# EAGLE board tulip breakout (EAGLE 9.6.2)
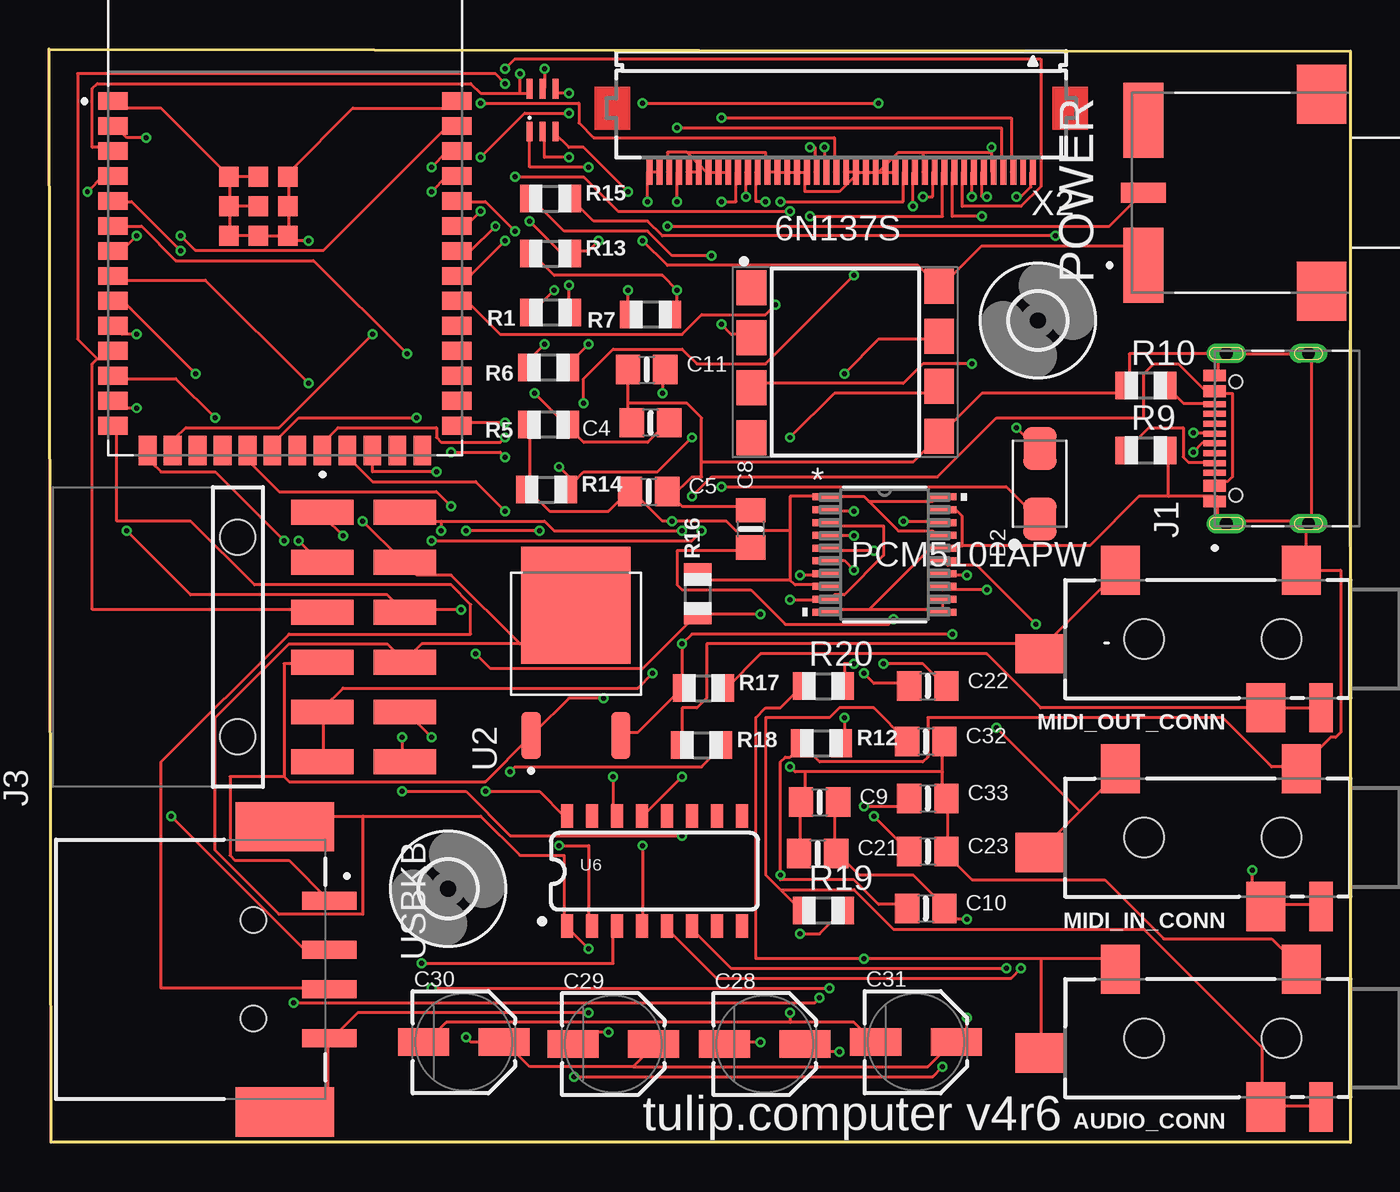
[diagram p0: board, top side]
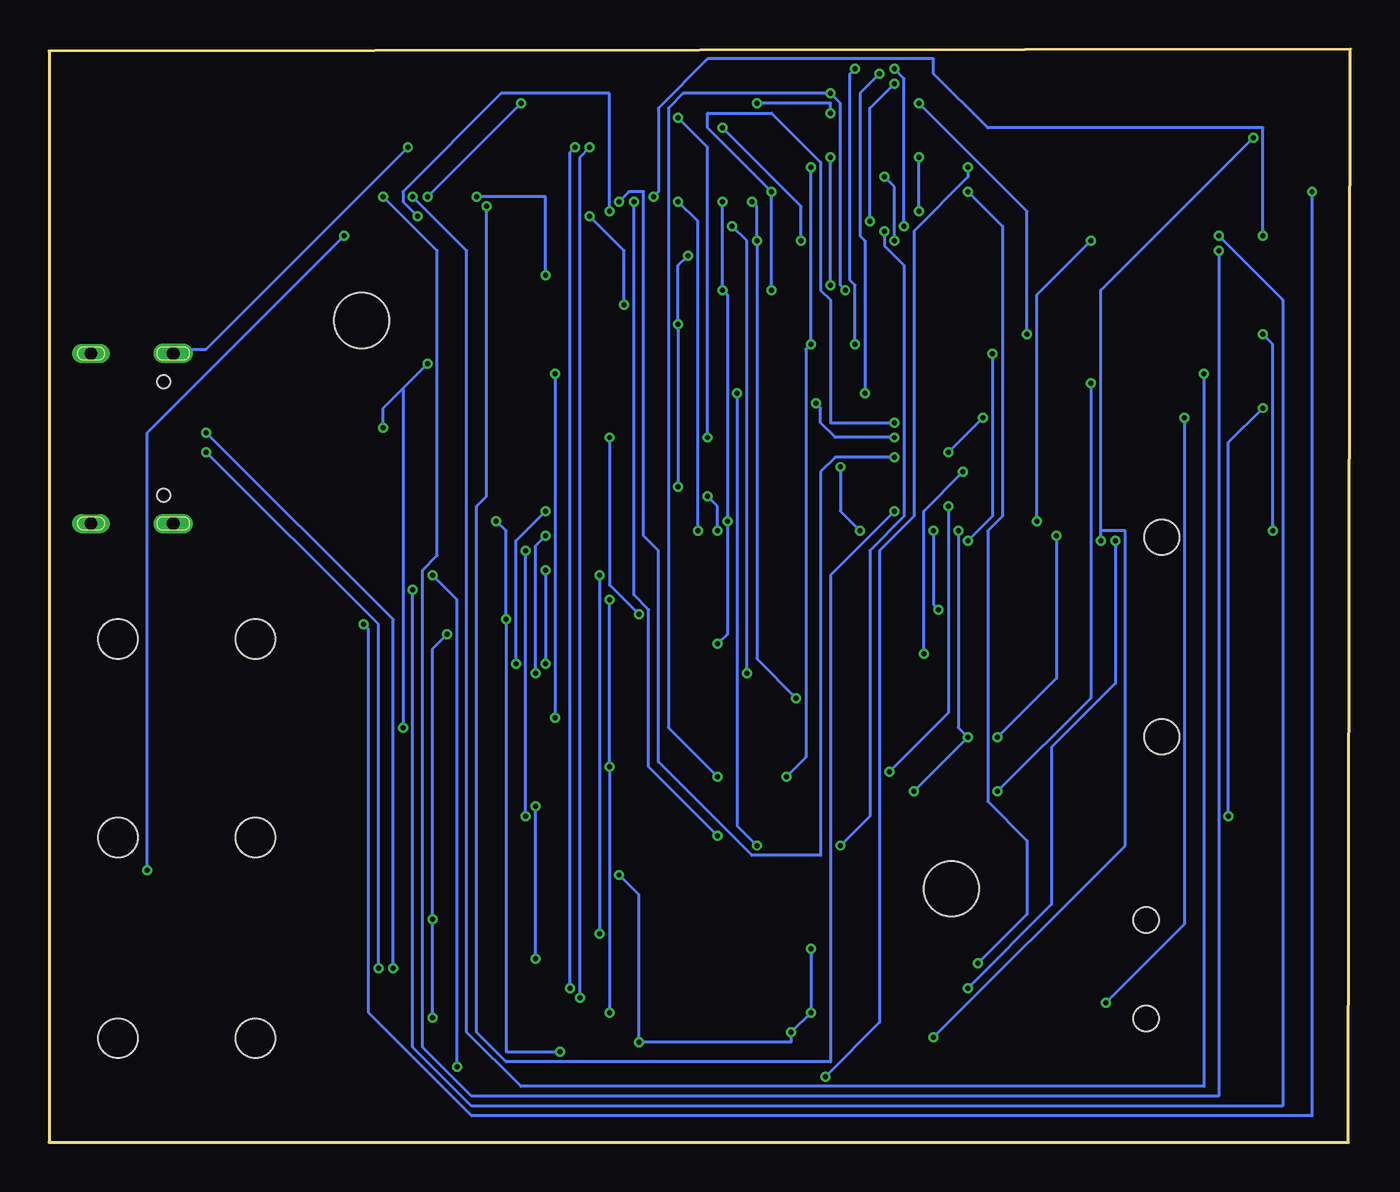
[diagram p1: board, bottom side, seen from below]

Size 66.2 x 55.6 mm. Coordinates in mm from the lower left corner, seen from the top.
Outline: 0.1,0 0,55.6 66.2,55.5 66.2,0 0.1,0
Copper layers (1*16): Top 0.035559375mm / dielectric 1.6mm / Bottom 0.035559375mm
Design rules "oshpark-2layer *": minimum track width 6mil, minimum drill 10mil, track to track 6mil, track to pad 6mil, pad to pad 6mil, via to via 6mil, smd to smd 6mil, copper to edge 0mil, drill to drill 6mil, minimum pad ring 5mil, minimum via ring 5mil, stop-mask expansion 2.5mil, vias tented up to drill 0mil, thermal gap 10mil
Net classes: 1 power: width 0.178 mm

## Footprints (pad centres in the part's own frame; a part is rotated, then mirrored left to right if it is on the bottom)
8-SMD = smd 1.52 x 1.78: 1 -4.96,3.96; 2 -4.96,1.42; 3 -4.96,-1.12; 4 -4.96,-3.66; 5 4.58,-3.59; 6 4.58,-1.05; 7 4.58,1.49; 8 4.58,4.03
4UCONN_19269 = smd 2 x 2.5: 1 2.5,-3.5; 2 11.7,-3.5; 3 4.3,3.5 | smd 2.5 x 2: 4 15.8,0.75 | smd 1.2 x 2.5: 5 1.5,3.5 | hole 2: 3.5,0; 10.5,0
0805-NO = smd 1.24 x 1.5: 1 -0.95,0; 2 0.95,0
PANASONIC_C = smd 2.6 x 1.4: + 2.05,0; - -2.05,0
DIOM449X264X300L114X135N = smd 2.17 x 1.69: A 1.795,0; C -1.795,0
2,8 = hole 2.8: 0,0
VALCON_CSP-USC16-TR = smd 0.3 x 1.14: A1 -3.35,0; A4 -2.55,0; A5 -1.25,0; A6 -0.25,0; A7 0.25,0; A8 1.25,0; A9 2.55,0; A12 3.35,0; B1 3.05,0; B4 2.25,0; B5 1.75,0; B6 0.75,0; B7 -0.75,0; B8 -1.75,0; B9 -2.25,0; B12 -3.05,0 | drill 0.65 pad 1 long: S1 -4.325,-0.59; S2 4.325,-0.59 | drill 0.65 pad 0.9 long: S3 -4.325,-4.77; S4 4.325,-4.77 | hole 0.65: -2.89,-1.07; 2.89,-1.07
SAMTEC_TSM-106-02-L-DH-A = smd 1.27 x 3.18: 01 6.35,-4.305; 02 6.35,-8.495; 03 3.81,-4.305; 04 3.81,-8.495; 05 1.27,-4.305; 06 1.27,-8.495; 07 -1.27,-4.305; 08 -1.27,-8.495; 09 -3.81,-4.305; 10 -3.81,-8.495; 11 -6.35,-4.305; 12 -6.35,-8.495 | hole 1.78: -5.08,0; 5.08,0
SW_500ASSP1SM6QE = smd 3.81 x 2.03: 1 -3.685,4.535; 3 3.685,4.535 | smd 1.02 x 2.29: 2 0,4.535 | smd 3 x 2.5: S1 -5,-4.535; S2 5,-4.535
R0805 = smd 1.1 x 1.4: 1 -1,0; 2 1,0
SOT236 = smd 0.3 x 1: 1 -0.66,-1.09; 2 0,-1.09; 3 0.66,-1.09; 4 0.66,1.09; 5 0,1.09; 6 -0.66,1.09
XCVR_ESP32-S3-WROOM-2-N32R8V = smd 1.5 x 0.9: 1 -8.75,5.26; 2 -8.75,3.99; 3 -8.75,2.72; 4 -8.75,1.45; 5 -8.75,0.18; 6 -8.75,-1.09; 7 -8.75,-2.36; 8 -8.75,-3.63; 9 -8.75,-4.9; 10 -8.75,-6.17; 11 -8.75,-7.44; 12 -8.75,-8.71; 13 -8.75,-9.98; 14 -8.75,-11.25; 27 8.75,-11.25; 28 8.75,-9.98; 29 8.75,-8.71; 30 8.75,-7.44; 31 8.75,-6.17; 32 8.75,-4.9; 33 8.75,-3.63; 34 8.75,-2.36; 35 8.75,-1.09; 36 8.75,0.18; 37 8.75,1.45; 38 8.75,2.72; 39 8.75,3.99; 40 8.75,5.26 | smd 0.9 x 1.5: 15 -6.985,-12.5; 16 -5.715,-12.5; 17 -4.445,-12.5; 18 -3.175,-12.5; 19 -1.905,-12.5; 20 -0.635,-12.5; 21 0.635,-12.5; 22 1.905,-12.5; 23 3.175,-12.5; 24 4.445,-12.5; 25 5.715,-12.5; 26 6.985,-12.5 | smd 1 x 1: 41_1 -1.36,-0.09; 41_2 -2.86,-0.09; 41_3 0.14,-0.09; 41_4 -2.86,-1.59; 41_5 -1.36,-1.59; 41_6 0.14,-1.59; 41_7 -2.86,1.41; 41_8 -1.36,1.41; 41_9 0.14,1.41
DPAK456P972X240-3N = smd 2.4 x 0.98: 1 -4.2,2.28; 2 -4.2,-2.28 | smd 5.96 x 5.57: 3 2.42,0
PW20_TEX = smd 1.473 x 0.356: 1 -2.921,2.925; 2 -2.921,2.275; 3 -2.921,1.625; 4 -2.921,0.975; 5 -2.921,0.325; 6 -2.921,-0.325; 7 -2.921,-0.975; 8 -2.921,-1.625; 9 -2.921,-2.275; 10 -2.921,-2.925; 11 2.921,-2.925; 12 2.921,-2.275; 13 2.921,-1.625; 14 2.921,-0.975; 15 2.921,-0.325; 16 2.921,0.325; 17 2.921,0.975; 18 2.921,1.625; 19 2.921,2.275; 20 2.921,2.925
SO016 = smd 0.6 x 1.2: 1 -4.445,-2.8; 2 -3.175,-2.8; 3 -1.905,-2.8; 4 -0.635,-2.8; 5 0.635,-2.8; 6 1.905,-2.8; 7 3.175,-2.8; 8 4.445,-2.8; 9 4.445,2.8; 10 3.175,2.8; 11 1.905,2.8; 12 0.635,2.8; 13 -0.635,2.8; 14 -1.905,2.8; 15 -3.175,2.8; 16 -4.445,2.8
SAMTEC_USB-A-S-X-X-SM2 = smd 0.9 x 2.8: 01 -3.5,3.85; 02 -1,3.85; 03 1,3.85; 04 3.5,3.85 | smd 2.5 x 5: S1 -7.25,1.6; S2 7.25,1.6 | hole 1.3: -2.5,0; 2.5,0
FH12-40S-0.5SH = smd 0.3 x 1.3: 1 -9.75,3.25; 2 -9.25,3.25; 3 -8.75,3.25; 4 -8.25,3.25; 5 -7.75,3.25; 6 -7.25,3.25; 7 -6.75,3.25; 8 -6.25,3.25; 9 -5.75,3.25; 10 -5.25,3.25; 11 -4.75,3.25; 12 -4.25,3.25; 13 -3.75,3.25; 14 -3.25,3.25; 15 -2.75,3.25; 16 -2.25,3.25; 17 -1.75,3.25; 18 -1.25,3.25; 19 -0.75,3.25; 20 -0.25,3.25; 21 0.25,3.25; 22 0.75,3.25; 23 1.25,3.25; 24 1.75,3.25; 25 2.25,3.25; 26 2.75,3.25; 27 3.25,3.25; 28 3.75,3.25; 29 4.25,3.25; 30 4.75,3.25; 31 5.25,3.25; 32 5.75,3.25; 33 6.25,3.25; 34 6.75,3.25; 35 7.25,3.25; 36 7.75,3.25; 37 8.25,3.25; 38 8.75,3.25; 39 9.25,3.25; 40 9.75,3.25

## Placement (x,y rotation side)
6N137S  6N137S  [8-SMD]  40.7,39.5 0 top
AUDIO_CONN  19269  [4UCONN_19269]  66.2,5.3 180 top
C4  4.7uF  [0805-NO]  30.6,36.6 180 top
C5  4.7uF  [0805-NO]  30.5,33.1 0 top
C8  0.1uF  [0805-NO]  35.7,31.2 90 top
C9  0.1uF  [0805-NO]  39.2,17.3 0 top
C10  0.1uF  [0805-NO]  44.6,11.9 0 top
C11  10uF  [0805-NO]  30.4,39.3 0 top
C21  0.1uF  [0805-NO]  39.1,14.7 0 top
C22  2.2uF  [0805-NO]  44.7,23.2 0 top
C23  2.2uF  [0805-NO]  44.7,14.8 0 top
C28  10uF  [PANASONIC_C]  36.4,5 0 top
C29  10uF  [PANASONIC_C]  28.7,5 0 top
C30  10uF  [PANASONIC_C]  21.1,5.1 0 top
C31  10uF  [PANASONIC_C]  44.1,5.1 0 top
C32  2.2nF  [0805-NO]  44.6,20.4 0 top
C33  2.2nF  [0805-NO]  44.7,17.5 0 top
D2  EGF1A  [DIOM449X264X300L114X135N]  50.4,33.5 90 top
H1  MOUNT-HOLE2.8  [2,8]  20.3,12.9 0 top
H2  MOUNT-HOLE2.8  [2,8]  50.3,41.8 0 top
J1  CSP-USC16-TR  [VALCON_CSP-USC16-TR]  59.3,35.8 90 top
J3  TSM-106-02-L-DH-A  [SAMTEC_TSM-106-02-L-DH-A]  9.6,25.7 90 top
MIDI_IN_CONN  19269  [4UCONN_19269]  66.2,15.5 180 top
MIDI_OUT_CONN  19269  [4UCONN_19269]  66.2,25.6 180 top
POWER  500ASSP1SM6QE  [SW_500ASSP1SM6QE]  60.2,48.3 90 top
R1  100k  [R0805]  25.5,42.2 180 top
R5  10k  [R0805]  25.4,36.5 180 top
R6  100k  [R0805]  25.4,39.4 180 top
R7  10k  [R0805]  30.6,42.1 180 top
R9  5.1K  [R0805]  55.8,35.2 0 top
R10  5.1K  [R0805]  55.8,38.5 0 top
R12  4.7K  [R0805]  39.3,20.3 0 top
R13  4.7K  [R0805]  25.5,45.2 0 top
R14  4.7K  [R0805]  25.3,33.2 0 top
R15  220  [R0805]  25.5,48 0 top
R16  470  [R0805]  33,27.9 90 top
R17  33  [R0805]  33.3,23.1 0 top
R18  10  [R0805]  33.2,20.2 0 top
R19  470  [R0805]  39.4,11.8 0 top
R20  470  [R0805]  39.4,23.2 0 top
RESET  MBT3904DW1T1G  [SOT236]  25.1,52.5 0 top
U1  ESP32-S3-WROOM-2-N32R8V  [XCVR_ESP32-S3-WROOM-2-N32R8V]  12,47.7 0 top
U2  LD29150DT33R  [DPAK456P972X240-3N]  26.8,24.9 90 top
U3  PCM5101APW  [PW20_TEX]  42.5,29.9 0 top
U6  CH340C  [SO016]  30.8,13.8 0 top
USBKB  USB-A-S-X-X-SM2  [SAMTEC_USB-A-S-X-X-SM2]  10.4,8.8 270 top
X2  FH12-40S-0.5SH  [FH12-40S-0.5SH]  40.3,52.6 180 top

## Library data of the parts
6N137S = 6N137S; AVAILABILITY: In Stock; DESCRIPTION: Logic Output Optoisolator 15MBd Open Collector 5000Vrms 1 Channel 10kV/µs CMTI 8-SMD; MF: Lite-On Inc.; MP: 6N137S; PACKAGE: SMD-8 Lite-On Inc.; PRICE: None; PURCHASE-URL: https://pricing.snapeda.com/search/part/6N137S/?ref=eda
AUDIO_CONN C4 C5 C8-C11 C21-C23 C28-C33 MIDI_IN_CONN MIDI_OUT_CONN = microbuilder
D2 = EGF1A; AVAILABILITY: In Stock; DESCRIPTION: Diode Standard 50 V 1A Surface Mount DO-214AC (SMA); MF: ON Semiconductor; MP: EGF1A; PACKAGE: SMA-2 ON Semiconductor; PRICE: None; PURCHASE-URL: https://pricing.snapeda.com/search/part/EGF1A/?ref=eda
H1 H2 = holes
J1 = CSP-USC16-TR; AVAILABILITY: In Stock; DESCRIPTION: CSP-USC16-TR Valcon USB Type C Surface Mount PCB Socket; MF: Valcon; MP: CSP-USC16-TR; PACKAGE: None; PRICE: None; PURCHASE-URL: https://pricing.snapeda.com/search/part/CSP-USC16-TR/?ref=eda
J3 = TSM-106-02-L-DH-A; DESCRIPTION: Connector Header Surface Mount, Right Angle 12 position 0.100 (2.54mm); DIGI-KEY_PART_NUMBER: 612-TSM-106-02-L-DH-A-ND; MF: Samtec; MP: TSM-106-02-L-DH-A; PACKAGE: None; PURCHASE-URL: https://pricing.snapeda.com/search/part/TSM-106-02-L-DH-A/?ref=eda
POWER = 500ASSP1SM6QE; DESCRIPTION: Slide Switch SPDT Surface Mount, Right Angle; DIGI-KEY_PART_NUMBER: EG5810TR-ND; MF: E-Switch; MP: 500ASSP1SM6QE; PACKAGE: None; PURCHASE-URL: https://pricing.snapeda.com/search/part/500ASSP1SM6QE/?ref=eda
R1 R5-R7 R9 R10 R12-R20 = adafruit
RESET = MBT3904DW1T1G; AVAILABILITY: In Stock; DESCRIPTION: Bipolar (BJT) Transistor Array 2 NPN (Dual) 40V 200mA 300MHz 150mW Surface Mount SC-88/SC70-6/SOT-363; MF: ON Semiconductor; MP: MBT3904DW1T1G; PACKAGE: SC-88-6 ON Semiconductor; PRICE: None; PURCHASE-URL: https://pricing.snapeda.com/search/part/MBT3904DW1T1G/?ref=eda
U1 = ESP32-S3-WROOM-2-N32R8V; AVAILABILITY: In Stock; DESCRIPTION: Bluetooth, WiFi 802.11b/g/n, Bluetooth v5.0 Transceiver Module 2.4GHz PCB Trace Surface Mount; MF: Espressif Systems; MP: ESP32-S3-WROOM-2-N32R8V; PACKAGE: Package; PRICE: None; PURCHASE-URL: https://pricing.snapeda.com/search/part/ESP32-S3-WROOM-2-N32R8V/?ref=eda
U2 = LD29150DT33R; DESCRIPTION: Linear Voltage Regulator IC Positive Fixed 1 Output 1.5A DPAK; DIGI-KEY_PART_NUMBER: 497-1496-2-ND; MF: STMicroelectronics; MP: LD29150DT33R; PACKAGE: TO-252 STMicroelectronics; PURCHASE-URL: https://pricing.snapeda.com/search/part/LD29150DT33R/?ref=eda
U3 = pcm5101apw; COPYRIGHT: Copyright (C) 2022 Ultra Librarian. All rights reserved.; DIGI-KEY_PART_NUMBER_1: PCM5101APW-ND; MANUFACTURER_PART_NUMBER: PCM5101APW; MFR_NAME: Texas Instruments
U6 = SparkFun-IC-Comms; PROD_ID: IC-14038
USBKB = USB-A-S-X-X-SM2; AVAILABILITY: In Stock; DESCRIPTION: USB-A (USB TYPE-A) USB 2.0 Receptacle Connector 4 Position Surface Mount, Right Angle; MF: Samtec; MP: USB-A-S-F-W-SM2-TR; PACKAGE: None; PRICE: None; PURCHASE-URL: https://pricing.snapeda.com/search/part/USB-A-S-F-W-SM2-TR/?ref=eda
X2 = con-hirose; MPN: FH12-40S-0.5SH(55); OC_FARNELL: 1324556; OC_NEWARK: 34M6178

## Nets
3V3: C5.1 C9.2 C10.2 C21.2 C29.+ C30.+ C31.+ J3.03 R5.2 R7.1 R13.1 R14.1 R16.2 R17.1 U1.2 U2.2 U3.1 U3.8 U3.17 U3.20 X2.37
5V: 6N137S.8 J3.07 POWER.1 U2.1 USBKB.01 X2.39 X2.40
5V_IN: J3.01 J3.12
5V_USB: J1.A4 J1.A9 J1.B4 J1.B9 J3.02 J3.10 U6.16
!DTR: R1.2 RESET.4 U6.13
!RTS: R6.1 RESET.1 U6.14
AGND: AUDIO_CONN.1 C9.1 C21.1 C23.2 C30.- C31.- C32.2 C33.2 U3.3 U3.9
B6: U1.20 X2.14
B7: U1.23 X2.13
BCLK: U1.39 U3.13
BLEN: U1.32 X2.10
D+: U1.14 USBKB.03
D-: U1.13 USBKB.02
DE: U1.35 X2.7
DIN: U1.38 U3.14
DN1: J1.A7 U6.6
DP1: J1.A6 U6.5
ESP32_EN: C4.1 R5.1 RESET.6 U1.3
G5: U1.12 X2.23
G6: U1.15 X2.22
G7: U1.16 X2.21
GND: 6N137S.5 C4.2 C5.2 C8.2 C10.1 C11.1 C28.- C29.- J1.A1 J1.A12 J1.B1 J1.B12 J1.S1 J1.S2 J1.S3 J1.S4 J3.04 J3.08 MIDI_IN_CONN.1 MIDI_OUT_CONN.1 R9.2 R10.1 R12.1 U1.1 U1.40 U1.41_1 U1.41_2 U1.41_3 U1.41_4 U1.41_5 U1.41_6 U1.41_7 U1.41_8 U1.41_9 U2.3 U3.10 U3.11 U3.12 U3.16 U3.19 U6.1 USBKB.04 USBKB.S1 USBKB.S2 X2.5 X2.12 X2.15 X2.16 X2.17 X2.18 X2.19 X2.20 X2.24 X2.25 X2.26 X2.27 X2.28 X2.32 X2.33 X2.34 X2.35 X2.36 X2.38
GPIO10: U1.18
HSYNC: U1.33 X2.9
INT: U1.5 X2.1
IO0: R7.2 RESET.3 U1.27
LOUT: AUDIO_CONN.2 AUDIO_CONN.4 C33.1 R20.1
LRC: U1.4 U3.15
MIDI_IN: 6N137S.6 R16.1 U1.24
MIDI_IN_SINK: 6N137S.3 D2.A MIDI_IN_CONN.2 MIDI_IN_CONN.4
MIDI_IN_SOURCE: MIDI_IN_CONN.3 MIDI_IN_CONN.5 R15.2
MIDI_OUT: R18.2 U1.19
MIDI_OUT_SINK: MIDI_OUT_CONN.2 MIDI_OUT_CONN.4 R18.1
MIDI_OUT_SOURCE: MIDI_OUT_CONN.3 MIDI_OUT_CONN.5 R17.2
N$1: R1.1 RESET.2
N$2: R6.2 RESET.5
N$3: J1.B5 R10.2
N$7: C8.1 C28.+ U3.18
N$8: R19.2 U3.7
N$10: J3.09 J3.11 POWER.2
N$16: C22.1 U3.4
N$18: C22.2 U3.2
N$30: 6N137S.2 D2.C R15.1
N$32: 6N137S.7 R12.2
N$38: C11.2 U6.4
N$42: J1.A5 R9.1
OUTL: R20.2 U3.6
PCLK: U1.22 X2.11
PWM: U1.9 X2.6
PWR: U1.17
R5: U1.6 X2.31
R6: U1.7 X2.30
R7: U1.8 X2.29
ROUT: AUDIO_CONN.3 AUDIO_CONN.5 C32.1 R19.1
SCL: J3.06 R14.2 U1.10 X2.3
SDA: J3.05 R13.2 U1.11 X2.4
UART0_RXD: U1.36 U6.2
UART0_TXD: U1.37 U6.3
VNEG: C23.1 U3.5
VSYNC: U1.34 X2.8

## Tracks (layer width: path | path; a pad name or v marks a point on that pad's centre or on a via)
3V3  (via drill 0.25)
  Top 0.152: R5.2 24.45,36.35 24.45,33.35 R14.1 24.45,33.1 25.45,32.1 28.45,32.1 29.45,33.1 C5.1 29.7,33.1 31.2,31.6 v31.7,31.6 34.45,31.6 34.95,31.1 37.7,31.1 | 37.7,28.6 33.45,28.6 33.2,28.85 R16.2 | 37.7,28.6 37.95,28.35 39.45,28.35 U3.8 | 41.7,32.6 41.45,32.85 39.7,32.85 U3.1 39.45,32.85 37.7,32.85 37.7,31.1 | 41.7,32.6 43.2,31.1 44.95,31.1 45.2,30.85 U3.17 | 41.7,32.6 44.95,32.6 45.2,32.85 U3.20 | 37.7,31.1 37.7,28.6 | 32.2,23.1 29.95,20.85 29.2,20.85 U2.2 | v31.95,47.85 31.95,49.35 X2.37 | R7.1 31.95,42.1 v31.95,43.35 31.2,44.1 25.7,44.1 24.7,45.1 R13.1 | 32.2,23.1 v32.2,25.35 32.7,25.85 v45.95,25.85 | 32.2,23.1 R17.1 | v4.95,51.1 3.95,51.1 3.45,51.6 U1.2 | v12.7,30.6 13.7,29.6 J3.03 | C9.2 39.95,17.1 39.95,14.85 C21.2 40.2,14.6 41.2,13.6 43.95,13.6 45.45,12.1 C10.2 45.7,11.85 46.2,11.35 v46.7,11.35 | 29.7,3.85 24.45,3.85 23.2,5.1 C30.+ 21.45,5.1 v21.2,5.35 | 29.7,3.85 30.7,4.85 C29.+ | 29.7,3.85 44.7,3.85 45.95,5.1 C31.+ 46.7,5.1 v46.7,6.35
  Bottom 0.152: v31.95,47.85 v31.95,43.35 31.7,43.1 v31.7,31.6 31.7,25.85 v32.2,25.35 | v4.95,51.1 12.7,43.35 12.7,31.1 | v12.7,30.6 12.7,31.1 | v46.7,6.35 v46.7,11.35 46.7,25.1 v45.95,25.85 | 12.7,31.1 11.45,31.1 11.45,15.1 v21.2,5.35
5V  (via drill 0.25)
  Top 0.152: 11.95,18.6 12.2,18.35 22.2,18.35 24.45,20.6 U2.1 24.7,20.85 26.45,22.6 v28.2,22.6 | 11.95,18.6 11.95,24.35 13.7,24.35 J3.07 | USBKB.01 12.2,14.35 9.45,14.35 9.2,14.6 9.2,18.6 11.95,18.6 | X2.39 X2.40 30.45,49.35 v30.45,47.85 | v30.2,45.85 31.45,44.6 44.2,44.6 45.2,43.6 6N137S.8 45.45,43.6 47.45,45.6 54.7,45.6 55.45,44.85 POWER.1
  Bottom 0.152: v30.45,47.85 30.2,47.6 v30.2,45.85 30.2,24.6 v28.2,22.6
5V_IN  (via drill 0.25)
  Top 0.152: v17.95,20.6 17.95,19.35 J3.12 | v14.95,30.85 13.95,31.85 J3.01
  Bottom 0.152: v17.95,20.6 14.95,23.6 v14.95,30.85
5V_USB  (via drill 0.25)
  Top 0.152: v22.2,17.85 24.95,17.85 26.2,16.6 U6.16 | v19.45,20.6 18.2,21.85 J3.10 | 59.45,33.6 59.45,33.35 J1.A4 | 59.45,38.1 59.45,38.35 J1.A9 58.7,38.35 57.45,39.6 56.2,39.6 55.7,39.1 55.7,36.85 48.2,36.85 45.2,33.85 33.7,33.85 v32.7,32.85 | 59.45,33.6 59.95,33.6 60.2,33.85 60.2,38.1 59.45,38.1 | 59.45,33.6 J1.B9 | 59.45,38.1 J1.B4 | v32.2,31.1 25.7,31.1 25.2,31.6 19.95,31.6 | 19.95,31.6 18.45,31.6 18.2,31.85 J3.02 | 19.95,31.6 v19.95,31.1
  Bottom 0.152: v22.2,17.85 v19.45,20.6 19.95,21.1 v19.95,31.1 | v32.7,32.85 32.2,32.35 v32.2,31.1
!DTR  (via drill 0.25)
  Top 0.152: v26.45,53.35 25.7,53.35 RESET.4 | v25.7,43.35 24.7,42.35 R1.2 | v32.2,18.6 30.2,16.6 U6.13
  Bottom 0.152: v25.7,43.35 25.95,43.6 25.95,52.85 v26.45,53.35 33.95,53.35 34.7,52.6 34.7,21.1 v32.2,18.6
!RTS  (via drill 0.25)
  Top 0.152: v27.45,49.6 24.45,49.6 24.45,51.35 RESET.1 | v27.45,40.6 26.45,39.6 R6.1 | v28.7,18.6 28.7,16.6 U6.14
  Bottom 0.152: v27.45,49.6 v27.45,40.6 27.7,40.35 27.7,19.6 v28.7,18.6
AGND  (via drill 0.25)
  Top 0.152: 37.7,6.1 40.95,6.1 41.95,5.1 C31.- | 37.7,6.1 20.2,6.1 19.2,5.1 C30.- | U3.3 39.7,31.35 42.45,31.35 42.45,29.85 40.45,27.85 39.95,27.85 39.7,27.6 U3.9 39.45,27.6 v37.7,27.6 | C21.1 38.2,14.85 38.2,17.1 C9.1 38.45,17.35 38.45,18.85 | 45.45,18.85 45.45,17.6 C33.2 45.7,17.35 45.7,14.85 C23.2 45.7,14.6 46.95,13.35 53.7,13.35 56.7,10.35 62.2,10.35 63.7,8.85 AUDIO_CONN.1 | 45.45,18.85 45.45,20.35 C32.2 | 45.45,18.85 38.45,18.85 | v37.7,19.1 37.95,18.85 38.45,18.85 | v37.7,6.6 37.7,6.1
  Bottom 0.152: v37.7,27.6 v37.7,19.1 v37.7,6.6
B6  (via drill 0.25)
  Top 0.152: v37.2,47.85 43.45,47.85 43.45,49.35 X2.14 | v23.2,34.85 22.95,35.1 v20.45,35.1 | v18.7,36.85 12.7,36.85 11.2,35.35 U1.20
  Bottom 0.152: v37.2,47.85 36.7,48.35 35.95,48.35 35.95,30.85 35.2,30.1 35.2,19.35 30.45,14.6 26.95,14.6 26.95,34.1 26.2,34.85 v23.2,34.85 | v18.7,36.85 v20.45,35.1
B7  (via drill 0.25)
  Top 0.152: v43.95,47.6 43.95,49.35 X2.13 | v23.2,32.1 21.7,33.6 16.45,33.6 14.95,35.1 U1.23
  Bottom 0.152: v43.95,47.6 43.95,32.85 44.45,32.35 44.45,5.6 42.95,4.1 26.45,4.1 26.45,28.85 v23.2,32.1
BCLK  (via drill 0.25)
  Top 0.152: v47.7,28.1 45.45,28.1 U3.13 | v6.7,46.1 7.45,45.35 13.95,45.35 20.2,51.6 20.7,51.6 U1.39
  Bottom 0.152: v47.7,28.1 47.7,4.85 44.7,1.85 3.45,1.85 3.45,42.85 v6.7,46.1
BLEN  (via drill 0.25)
  Top 0.152: v38.7,47.1 45.45,47.1 45.45,49.35 X2.10 | v36.95,42.6 36.45,42.1 33.2,42.1 32.2,41.1 22.95,41.1 21.45,42.6 20.95,42.6 U1.32
  Bottom 0.152: v38.7,47.1 36.95,45.35 v36.95,42.6
D+
  Top 0.152: U1.14 3.45,36.35 3.45,31.6 7.2,31.6 10.45,28.35 20.45,28.35 21.45,27.35 21.45,25.85 12.2,25.85 5.7,19.35 5.7,7.85 14.2,7.85 USBKB.03
D-  (via drill 0.25)
  Top 0.152: v4.45,37.35 3.7,37.35 3.45,37.6 U1.13 | v6.2,16.6 12.95,9.85 14.2,9.85 USBKB.02
  Bottom 0.152: v4.45,37.35 6.2,35.6 v6.2,16.6
DE  (via drill 0.25)
  Top 0.152: v46.95,48.1 46.95,49.35 X2.7 | v30.2,52.85 v42.2,52.85 | v26.45,52.35 24.2,52.35 v21.95,50.1 | v21.95,47.35 21.45,46.85 20.95,46.85 U1.35
  Bottom 0.152: v42.2,52.85 v46.95,48.1 | v30.2,52.85 26.45,52.85 v26.45,52.35 | v21.95,47.35 v21.95,50.1
DIN  (via drill 0.25)
  Top 0.152: v46.7,28.85 45.45,28.85 U3.14 | v45.45,3.85 44.95,3.35 v26.7,3.35 | v19.45,49.6 20.2,50.35 20.7,50.35 U1.38
  Bottom 0.152: v46.7,28.85 45.45,27.6 v45.45,3.85 | v26.7,3.35 23.95,6.1 23.95,30.1 22.2,31.85 22.2,46.35 19.45,49.1 v19.45,49.6
DN1  (via drill 0.25)
  Top 0.152: v58.2,36.1 59.2,36.1 J1.A7 | v48.7,8.85 34.7,8.85 32.7,10.85 U6.6
  Bottom 0.152: v58.2,36.1 48.7,26.6 v48.7,8.85
DP1  (via drill 0.25)
  Top 0.152: v58.2,35.1 58.7,35.6 59.2,35.6 J1.A6 | v49.45,8.85 48.95,8.35 33.95,8.35 31.45,10.85 U6.5
  Bottom 0.152: v58.2,35.1 49.45,26.35 v49.45,8.85
ESP32_EN  (via drill 0.25)
  Top 0.152: C4.1 31.45,36.6 30.45,35.6 27.2,35.6 26.45,36.35 R5.1 26.2,36.6 v24.7,38.1 | 23.95,53.35 21.95,53.35 21.45,53.85 2.45,53.85 2.2,53.6 2.2,50.6 3.2,50.6 U1.3 | 23.95,53.35 24.45,53.35 RESET.6 | 23.95,53.35 v23.95,54.35
  Bottom 0.152: v24.7,38.1 24.7,45.85 24.95,46.1 24.95,53.35 v23.95,54.35
G5  (via drill 0.25)
  Top 0.152: v38.7,50.6 38.95,50.6 38.95,49.35 X2.23 | v39.2,7.35 38.95,7.1 v12.45,7.1 | v8.45,36.85 6.45,38.85 3.45,38.85 U1.12
  Bottom 0.152: v38.7,50.6 39.2,50.1 v39.2,7.35 | v12.45,7.1 8.45,11.1 v8.45,36.85
G6  (via drill 0.25)
  Top 0.152: v39.45,50.6 39.45,49.35 X2.22 | v19.45,7.85 v39.7,7.85 | v11.95,30.6 8.45,34.1 5.7,34.1 5.2,34.6 5.2,35.1 U1.15
  Bottom 0.152: v39.45,50.6 39.7,50.35 v39.7,7.85 | v19.45,7.85 15.2,12.1 15.2,20.1 11.95,23.35 v11.95,30.6
G7  (via drill 0.25)
  Top 0.152: v21.95,52.85 26.95,52.85 26.95,51.85 27.7,51.1 39.95,51.1 39.95,49.35 X2.21 | v16.45,41.1 11.7,36.35 6.95,36.35 6.45,35.85 6.45,35.35 U1.16
  Bottom 0.152: v21.95,52.85 16.45,47.35 v16.45,41.1
GND  (via drill 0.25)
  Top 0.152: C10.1 43.45,12.1 42.2,12.1 40.95,13.35 37.2,13.35 v37.2,13.6 37.2,19.35 37.45,19.6 37.7,19.6 38.2,20.1 R12.1 38.45,20.1 39.2,19.35 44.45,19.35 44.7,19.6 44.7,21.6 59.7,21.6 62.2,19.1 63.7,19.1 | U3.12 45.45,27.6 45.45,27.1 U3.11 45.2,27.1 41.7,27.1 | 41.7,27.1 39.7,27.1 U3.10 | 41.7,27.1 44.7,30.1 45.2,30.1 U3.16 45.45,30.35 46.45,30.35 | 46.45,30.35 46.45,31.85 46.2,32.1 45.45,32.1 U3.19 | 59.45,32.35 59.45,32.85 J1.B12 59.2,32.85 56.95,32.85 | 59.45,32.35 59.45,31.6 59.7,31.6 J1.S1 59.95,31.6 63.95,31.6 J1.S3 | 59.45,32.35 J1.A1 | 56.95,32.85 56.95,35.1 R9.2 | 63.95,29.1 63.95,31.35 J1.S3 | 63.7,19.1 65.2,20.6 65.45,20.6 65.7,20.85 65.7,29.1 63.95,29.1 | 63.95,29.1 MIDI_OUT_CONN.1 | 46.45,30.35 52.95,30.35 55.45,32.85 56.95,32.85 | 63.7,19.1 MIDI_IN_CONN.1 | 38.45,49.35 X2.25 37.95,49.35 X2.26 37.45,49.35 X2.27 36.95,49.35 X2.28 36.45,49.35 36.45,50.35 32.45,50.35 | 32.95,49.35 X2.36 32.45,49.35 | 32.45,50.35 31.45,50.35 31.45,49.35 X2.38 | 33.2,49.6 33.45,49.35 X2.34 33.95,49.35 X2.33 X2.32 | 33.2,49.6 32.45,50.35 | 33.2,49.6 32.95,49.35 | 32.95,49.35 X2.35 | 40.45,49.35 X2.20 40.95,49.35 X2.19 41.2,49.35 | 41.2,49.35 41.45,49.35 X2.18 41.95,49.35 X2.17 42.2,49.35 | 42.2,49.35 42.45,49.35 X2.16 X2.15 | 44.45,50.35 44.45,49.35 X2.12 | 44.45,50.35 43.2,50.35 42.2,49.35 | 47.95,50.35 47.95,49.35 X2.5 | 44.45,50.35 47.95,50.35 | 38.45,49.35 38.45,48.35 40.2,48.35 41.2,49.35 | 38.45,49.35 X2.24 | 29.45,37.6 29.45,36.6 C4.2 | 29.45,37.6 C11.1 | 31.7,32.85 32.2,32.35 35.7,32.35 C8.2 | 29.45,37.6 32.45,37.6 33.2,36.85 33.2,34.6 | 33.2,34.6 33.2,33.85 32.7,33.85 31.7,32.85 | 31.7,32.85 C5.2
  Top 0.152: 59.45,39.1 59.45,38.85 J1.B1 | 59.45,40.1 59.45,39.1 | 59.45,40.1 59.7,40.1 J1.S2 | 59.45,39.1 J1.A12 | 59.45,40.1 54.95,40.1 54.95,38.6 R10.1 54.7,38.35 54.45,38.1 47.45,38.1 45.45,36.1 6N137S.5 45.2,35.85 43.95,34.6 33.2,34.6 | 59.45,40.1 J1.S2 | J1.S2 59.95,40.1 63.95,40.1 J1.S4 64.2,40.1 64.2,31.6 J1.S3 | v47.95,50.6 47.95,50.35 | 9.2,49.1 10.45,49.1 U1.41_8 | 9.2,47.6 10.45,47.6 U1.41_1 | U1.41_6 11.95,46.1 10.7,46.1 U1.41_5 10.45,46.1 9.2,46.1 U1.41_4 9.2,46.35 9.2,47.6 | U1.41_6 12.2,46.35 12.2,47.6 U1.41_3 12.2,47.85 12.2,49.1 U1.41_9 12.2,49.35 15.45,52.6 20.45,52.6 20.7,52.85 U1.40 | 9.2,47.6 U1.41_2 9.2,47.85 9.2,49.1 | 9.2,49.1 U1.41_7 8.95,49.35 5.7,52.6 3.7,52.6 3.45,52.85 U1.1 | 23.95,25.35 24.95,25.35 26.7,27.1 U2.3 | 23.95,25.35 18.95,25.35 18.2,24.6 J3.08 17.95,24.6 17.2,25.35 12.2,25.35 8.45,21.6 8.45,14.85 11.7,11.6 15.95,11.6 15.95,16.6 | 23.95,25.35 20.45,28.85 18.7,28.85 18.2,29.35 J3.04 17.95,29.6 v15.95,31.6 | USBKB.S2 12.2,1.6 14.2,1.6 14.2,5.1 USBKB.04 14.45,5.35 15.7,6.6 v27.45,6.6 | 15.95,16.6 12.7,16.6 12.2,16.1 USBKB.S1 | 15.95,16.6 21.95,16.6 23.95,14.6 26.2,14.6 26.2,11.1 U6.1 26.45,10.85 v27.45,9.85 | v28.45,5.6 27.2,5.6 26.7,5.1 C29.- | v36.2,5.1 34.45,5.1 C28.- | v13.2,45.85 12.45,45.85 12.2,46.1 U1.41_6
  Bottom 0.152: v47.95,50.6 58.2,40.35 59.7,40.35 J1.S2 | v27.45,9.85 v27.45,6.6 v28.45,5.6 28.45,5.1 v36.2,5.1 36.2,12.6 v37.2,13.6 | v13.2,45.85 15.95,43.1 v15.95,31.6
HSYNC  (via drill 0.25)
  Top 0.152: v47.45,47.1 45.95,47.1 45.95,49.35 X2.9 | v37.7,47.35 28.95,47.35 27.2,49.1 v23.7,49.1 | v23.2,45.85 21.45,44.1 20.95,44.1 U1.33
  Bottom 0.152: v47.45,47.1 48.2,47.85 48.2,48.35 43.2,53.35 37.7,53.35 v37.7,47.35 | v23.7,49.1 23.2,48.6 v23.2,45.85
INT  (via drill 0.25)
  Top 0.152: v49.2,48.1 49.45,48.1 49.95,48.6 49.95,49.35 X2.1 | v6.7,45.35 4.2,47.85 3.45,47.85 U1.5
  Bottom 0.152: v49.2,48.1 46.45,45.35 46.45,29.85 47.2,29.1 47.2,4.85 44.7,2.35 6.7,2.35 v6.7,45.35
IO0  (via drill 0.25)
  Top 0.152: v29.45,48.35 27.2,50.6 26.45,50.6 25.7,51.35 RESET.3 | v29.45,43.35 29.45,42.1 R7.2 | v23.2,36.6 20.95,36.6 U1.27
  Bottom 0.152: v29.45,43.35 v29.45,48.35 32.7,51.6 32.7,52.35 29.45,52.35 26.95,49.85 26.95,43.35 26.45,42.85 26.45,36.6 v23.2,36.6
LOUT  (via drill 0.25)
  Top 0.152: 50.45,9.35 53.95,9.35 AUDIO_CONN.2 | 50.45,9.35 v41.45,9.35 35.95,9.35 35.95,21.6 36.45,22.1 37.2,22.1 38.2,23.1 R20.1 | v41.45,17.1 43.45,17.1 43.7,17.35 C33.1 | 50.45,9.35 50.45,4.6 AUDIO_CONN.4
  Bottom 0.152: v41.45,9.35 v41.45,17.1
LRC  (via drill 0.25)
  Top 0.152: v50.2,26.35 47.2,29.35 45.7,29.35 45.45,29.6 U3.15 | v1.95,48.35 2.7,49.1 3.2,49.1 U1.4
  Bottom 0.152: v50.2,26.35 49.95,26.1 49.95,6.6 44.7,1.35 1.95,1.35 v1.95,48.35
MIDI_IN  (via drill 0.25)
  Top 0.152: v36.2,26.85 33.2,26.85 R16.1 30.2,24.1 22.45,24.1 v21.7,24.85 | v37.7,35.85 39.95,38.1 44.95,38.1 45.2,38.35 6N137S.6 | v19.7,34.1 16.45,34.1 16.45,35.1 U1.24
  Bottom 0.152: v36.2,26.85 37.7,28.35 v37.7,35.85 | v19.7,34.1 21.7,32.1 v21.7,24.85
MIDI_IN_SINK  (via drill 0.25)
  Top 0.152: 52.45,16.85 54.45,18.85 MIDI_IN_CONN.2 | 52.45,16.85 50.45,14.85 MIDI_IN_CONN.4 | v46.95,39.6 44.45,39.6 43.45,38.6 35.95,38.6 6N137S.3 | v49.2,36.35 50.2,35.35 D2.A | v48.2,21.1 52.45,16.85
  Bottom 0.152: 48.2,38.35 49.2,37.35 v49.2,36.35 | 48.2,38.35 v46.95,39.6 | 48.2,38.35 v48.2,21.1
MIDI_IN_SOURCE  (via drill 0.25)
  Top 0.152: v51.2,46.1 31.2,46.1 30.45,46.85 27.7,46.85 26.7,47.85 R15.2 | v61.2,13.85 61.2,12.1 61.7,12.1 MIDI_IN_CONN.3 61.95,12.1 64.7,12.1 MIDI_IN_CONN.5
  Bottom 0.152: v51.2,46.1 61.2,36.1 v61.2,13.85
MIDI_OUT  (via drill 0.25)
  Top 0.152: v23.45,18.85 23.7,19.1 33.2,19.1 34.2,20.1 R18.2 | v20.45,32.35 19.7,33.1 11.7,33.1 10.2,34.6 10.2,35.1 U1.19
  Bottom 0.152: v23.45,18.85 20.45,21.85 v20.45,32.35
MIDI_OUT_SINK
  Top 0.152: R18.1 32.2,22.1 32.95,22.1 33.45,22.6 33.45,25.35 49.7,25.35 50.2,24.85 | 50.2,24.85 54.45,29.1 MIDI_OUT_CONN.2 | 50.2,24.85 MIDI_OUT_CONN.4
MIDI_OUT_SOURCE
  Top 0.152: R17.2 34.45,23.1 36.2,24.85 47.7,24.85 50.45,22.1 MIDI_OUT_CONN.3 MIDI_OUT_CONN.5
N$1  (via drill 0.25)
  Top 0.152: v26.45,50.1 25.2,50.1 25.2,51.35 RESET.2 | v26.45,43.6 26.45,42.35 R1.1
  Bottom 0.152: v26.45,43.6 v26.45,50.1
N$2  (via drill 0.25)
  Top 0.152: v25.2,54.6 25.2,53.6 RESET.5 | v25.2,40.6 24.2,39.6 R6.2
  Bottom 0.152: v25.2,54.6 25.45,54.35 25.45,43.85 25.2,43.6 v25.2,40.6
N$3
  Top 0.152: R10.2 57.7,37.6 59.2,37.6 J1.B5
N$7  (via drill 0.25)
  Top 0.152: v43.45,31.6 45.2,31.6 U3.18 | v42.95,26.6 42.7,26.35 37.45,26.35 35.7,28.1 32.2,28.1 31.95,28.35 31.95,30.1 35.7,30.1 C8.1 | v40.2,4.6 38.7,4.6 38.45,4.85 C28.+
  Bottom 0.152: v43.45,31.6 42.95,31.1 v42.95,26.6 42.95,4.6 v40.2,4.6
N$8  (via drill 0.25)
  Top 0.152: R19.2 39.2,10.6 v38.2,10.6 | v38.2,28.85 39.45,28.85 U3.7
  Bottom 0.152: v38.2,28.85 v38.2,10.6
N$10  (via drill 0.25)
  Top 0.152: v31.45,46.6 53.95,46.6 55.45,48.1 POWER.2 | v30.7,23.85 29.95,23.1 14.95,23.1 13.95,22.1 J3.09 13.95,21.85 13.95,19.35 J3.11
  Bottom 0.152: v31.45,46.6 30.7,45.85 v30.7,23.85
N$16  (via drill 0.25)
  Top 0.152: v40.95,30.85 39.7,30.85 U3.4 | v41.45,23.85 41.95,23.35 43.7,23.35 C22.1
  Bottom 0.152: v40.95,30.85 41.45,30.35 v41.45,23.85
N$18  (via drill 0.25)
  Top 0.152: v40.95,32.1 39.7,32.1 U3.2 | v42.45,24.35 44.45,24.35 45.45,23.35 C22.2
  Bottom 0.152: v40.95,32.1 42.45,30.6 v42.45,24.35
N$30  (via drill 0.25)
  Top 0.152: v33.7,45.1 31.7,45.1 30.45,46.35 26.2,46.35 24.7,47.85 R15.1 | v34.2,41.6 34.7,41.1 35.7,41.1 6N137S.2 | v34.2,33.35 48.7,33.35 50.2,31.85 D2.C
  Bottom 0.152: v33.7,45.1 34.2,44.6 v34.2,41.6 v34.2,33.35
N$32  (via drill 0.25)
  Top 0.152: v40.45,21.6 40.45,20.35 R12.2 | v40.45,39.1 42.2,40.85 45.2,40.85 6N137S.7
  Bottom 0.152: v40.45,39.1 v40.45,21.6
N$38  (via drill 0.25)
  Top 0.152: v30.2,15.1 30.2,11.1 U6.4 | v31.2,38.1 31.2,39.1 C11.2
  Bottom 0.152: v30.2,15.1 31.2,16.1 v31.2,38.1
N$42
  Top 0.152: R9.1 55.95,36.35 57.7,36.35 57.7,34.85 57.95,34.6 59.2,34.6 J1.A5
OUTL  (via drill 0.25)
  Top 0.152: v40.95,24.35 40.45,24.35 40.45,23.35 R20.2 | v40.95,29.1 40.45,29.6 39.7,29.6 U3.6
  Bottom 0.152: v40.95,29.1 v40.95,24.35
PCLK  (via drill 0.25)
  Top 0.152: v44.45,48.1 44.95,48.1 44.95,49.35 X2.11 | v40.95,44.1 36.45,39.6 32.95,39.6 32.2,40.35 28.7,40.35 27.2,38.85 v27.2,37.6 | v23.2,35.85 22.95,35.6 19.95,35.6 19.7,35.85 19.7,36.35 14.7,36.35 13.7,35.35 U1.22
  Bottom 0.152: v44.45,48.1 40.95,48.1 v40.95,44.1 | v27.2,37.6 26.95,37.35 26.95,36.6 26.2,35.85 v23.2,35.85
PWM  (via drill 0.25)
  Top 0.152: v47.7,48.1 47.45,48.1 47.45,49.35 X2.6 | v7.45,39.1 3.95,42.6 3.45,42.6 U1.9
  Bottom 0.152: v47.7,48.1 44.95,45.35 44.95,5.6 42.2,2.85 7.45,2.85 v7.45,39.1
R5  (via drill 0.25)
  Top 0.152: v34.2,47.85 34.95,47.85 34.95,49.35 X2.31 | v33.2,31.1 32.7,30.6 v19.45,30.6 | v18.2,40.1 13.45,44.85 6.45,44.85 4.7,46.6 3.45,46.6 U1.6
  Bottom 0.152: v34.2,47.85 33.2,46.85 v33.2,31.1 | v19.45,30.6 18.2,31.85 v18.2,40.1
R6  (via drill 0.25)
  Top 0.152: v35.45,48.1 35.45,49.35 X2.30 | v4.45,46.1 3.7,45.35 3.45,45.35 U1.7
  Bottom 0.152: v35.45,48.1 35.2,48.35 35.2,52.6 32.7,55.1 21.2,55.1 21.2,54.35 18.45,51.6 4.45,51.6 v4.45,46.1
R7  (via drill 0.25)
  Top 0.152: v36.45,47.85 35.95,47.85 35.95,49.35 X2.29 | v32.2,15.6 23.45,15.6 21.2,17.85 v17.95,17.85 | v13.2,38.6 7.95,43.85 3.45,43.85 U1.8
  Bottom 0.152: v36.45,47.85 36.45,27.85 35.7,27.1 35.7,19.1 v32.2,15.6 | v17.95,17.85 13.2,22.6 v13.2,38.6
ROUT
  Top 0.152: AUDIO_CONN.5 64.7,1.85 61.95,1.85 AUDIO_CONN.3 61.7,1.85 61.7,4.85 55.7,10.85 42.95,10.85 40.95,12.85 37.2,12.85 | 37.2,12.85 36.45,13.6 36.45,21.6 39.7,21.6 40.2,22.1 41.95,22.1 C32.1 | 37.2,12.85 38.2,11.85 R19.1
SCL  (via drill 0.25)
  Top 0.152: v4.45,41.1 3.7,41.1 3.45,41.35 U1.10 | v3.95,31.1 7.2,27.85 17.2,27.85 17.95,27.1 J3.06 18.2,27.1 v20.95,27.1 | v34.2,52.1 48.95,52.1 48.95,49.35 X2.3 | v32.7,35.85 30.95,34.1 27.2,34.1 26.7,33.6 | 26.7,33.6 R14.2 26.45,33.35 | v24.95,31.1 v21.2,31.1 | 26.7,33.6 v25.95,34.35
  Bottom 0.152: v4.45,41.1 3.95,40.6 v3.95,31.1 | v34.2,52.1 32.7,50.6 v32.7,35.85 | v20.95,27.1 21.2,27.35 v21.2,31.1 | v24.95,31.1 25.95,32.1 v25.95,34.35
SDA  (via drill 0.25)
  Top 0.152: 2.45,39.85 2.95,39.85 3.2,40.1 U1.11 | 2.45,39.85 2.2,39.6 2.2,27.1 13.7,27.1 J3.05 | v31.95,51.6 48.45,51.6 48.45,49.35 X2.4 | v27.95,45.85 27.45,45.35 26.7,45.35 R13.2 26.45,45.35 25.95,45.35 v24.45,46.85 | 2.45,39.85 1.45,40.85 1.45,54.35 22.7,54.35 v23.2,53.85
  Bottom 0.152: v31.95,51.6 27.95,47.6 v27.95,45.85 | v23.2,53.85 24.45,52.6 v24.45,46.85
UART0_RXD  (via drill 0.25)
  Top 0.152: v25.95,15.1 27.45,15.1 27.45,11.1 U6.2 | v23.7,46.35 22.2,47.85 20.95,47.85 U1.36
  Bottom 0.152: v25.95,15.1 24.45,16.6 24.45,30.1 22.7,31.85 22.7,44.6 23.7,45.6 v23.7,46.35
UART0_TXD  (via drill 0.25)
  Top 0.152: v18.95,9.1 28.7,9.1 28.7,10.85 U6.3 | v19.45,48.35 20.2,49.1 20.7,49.1 U1.37
  Bottom 0.152: v18.95,9.1 16.45,11.6 16.45,15.35 18.45,17.35 18.45,31.1 17.7,31.85 17.7,46.6 v19.45,48.35
VNEG  (via drill 0.25)
  Top 0.152: v41.95,30.1 39.7,30.1 U3.5 | C23.1 v41.95,16.6
  Bottom 0.152: v41.95,16.6 v41.95,30.1
VSYNC  (via drill 0.25)
  Top 0.152: v23.2,54.6 23.7,55.1 50.45,55.1 50.45,48.6 49.45,47.6 46.45,47.6 46.45,49.35 X2.8 | v22.7,46.6 21.45,45.35 20.95,45.35 U1.34
  Bottom 0.152: v23.2,54.6 22.7,54.1 v22.7,46.6

## Text on the board
tNames: tulip.computer v4r6
tValues: Close
Measures: All dimensions in inches | Units: Inches